# EAGLE board cytron-1 (EAGLE 8.6.1)
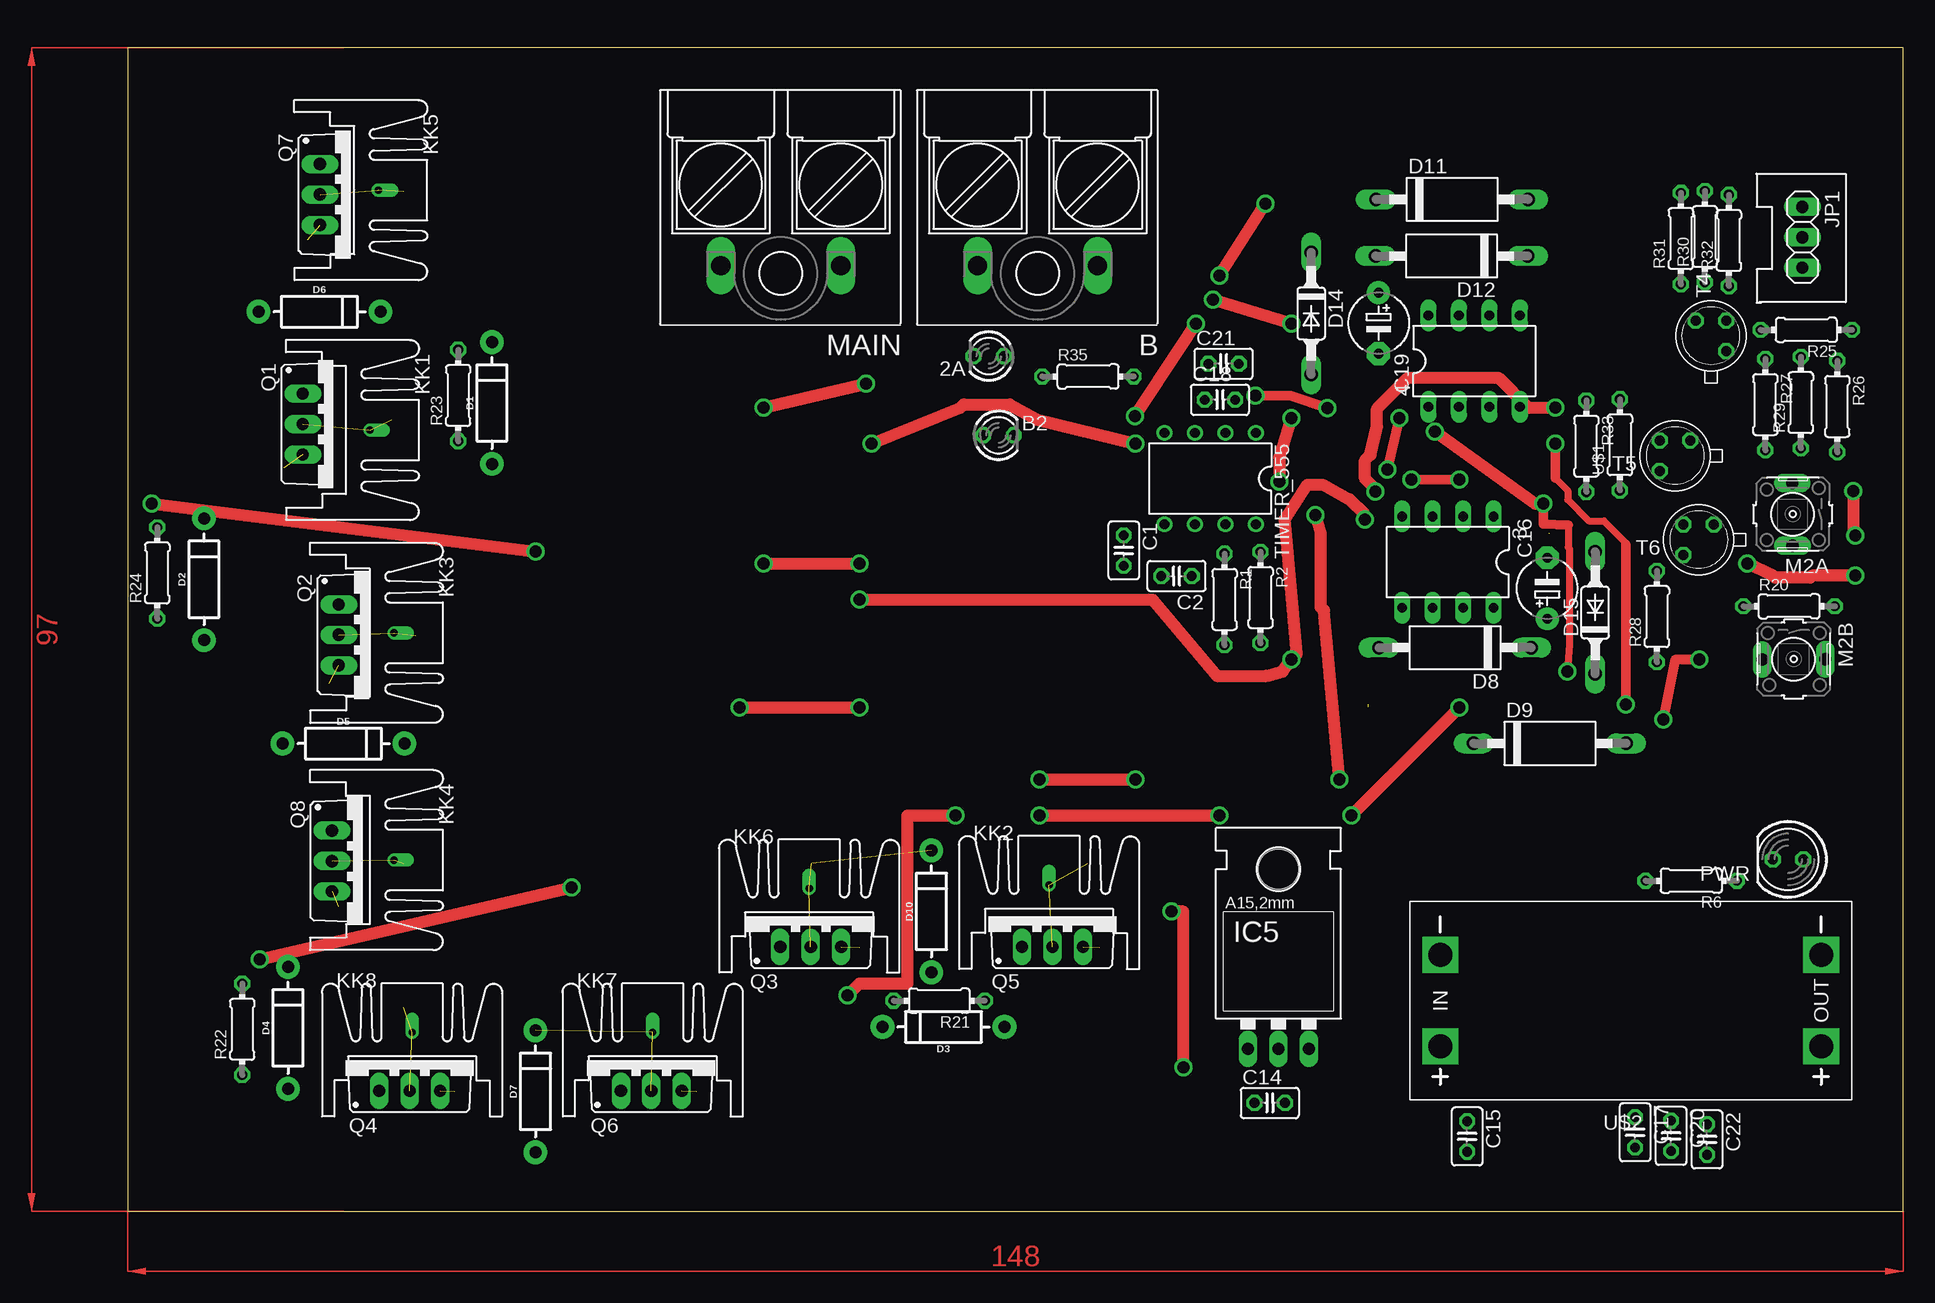
[diagram p0: board, top side]
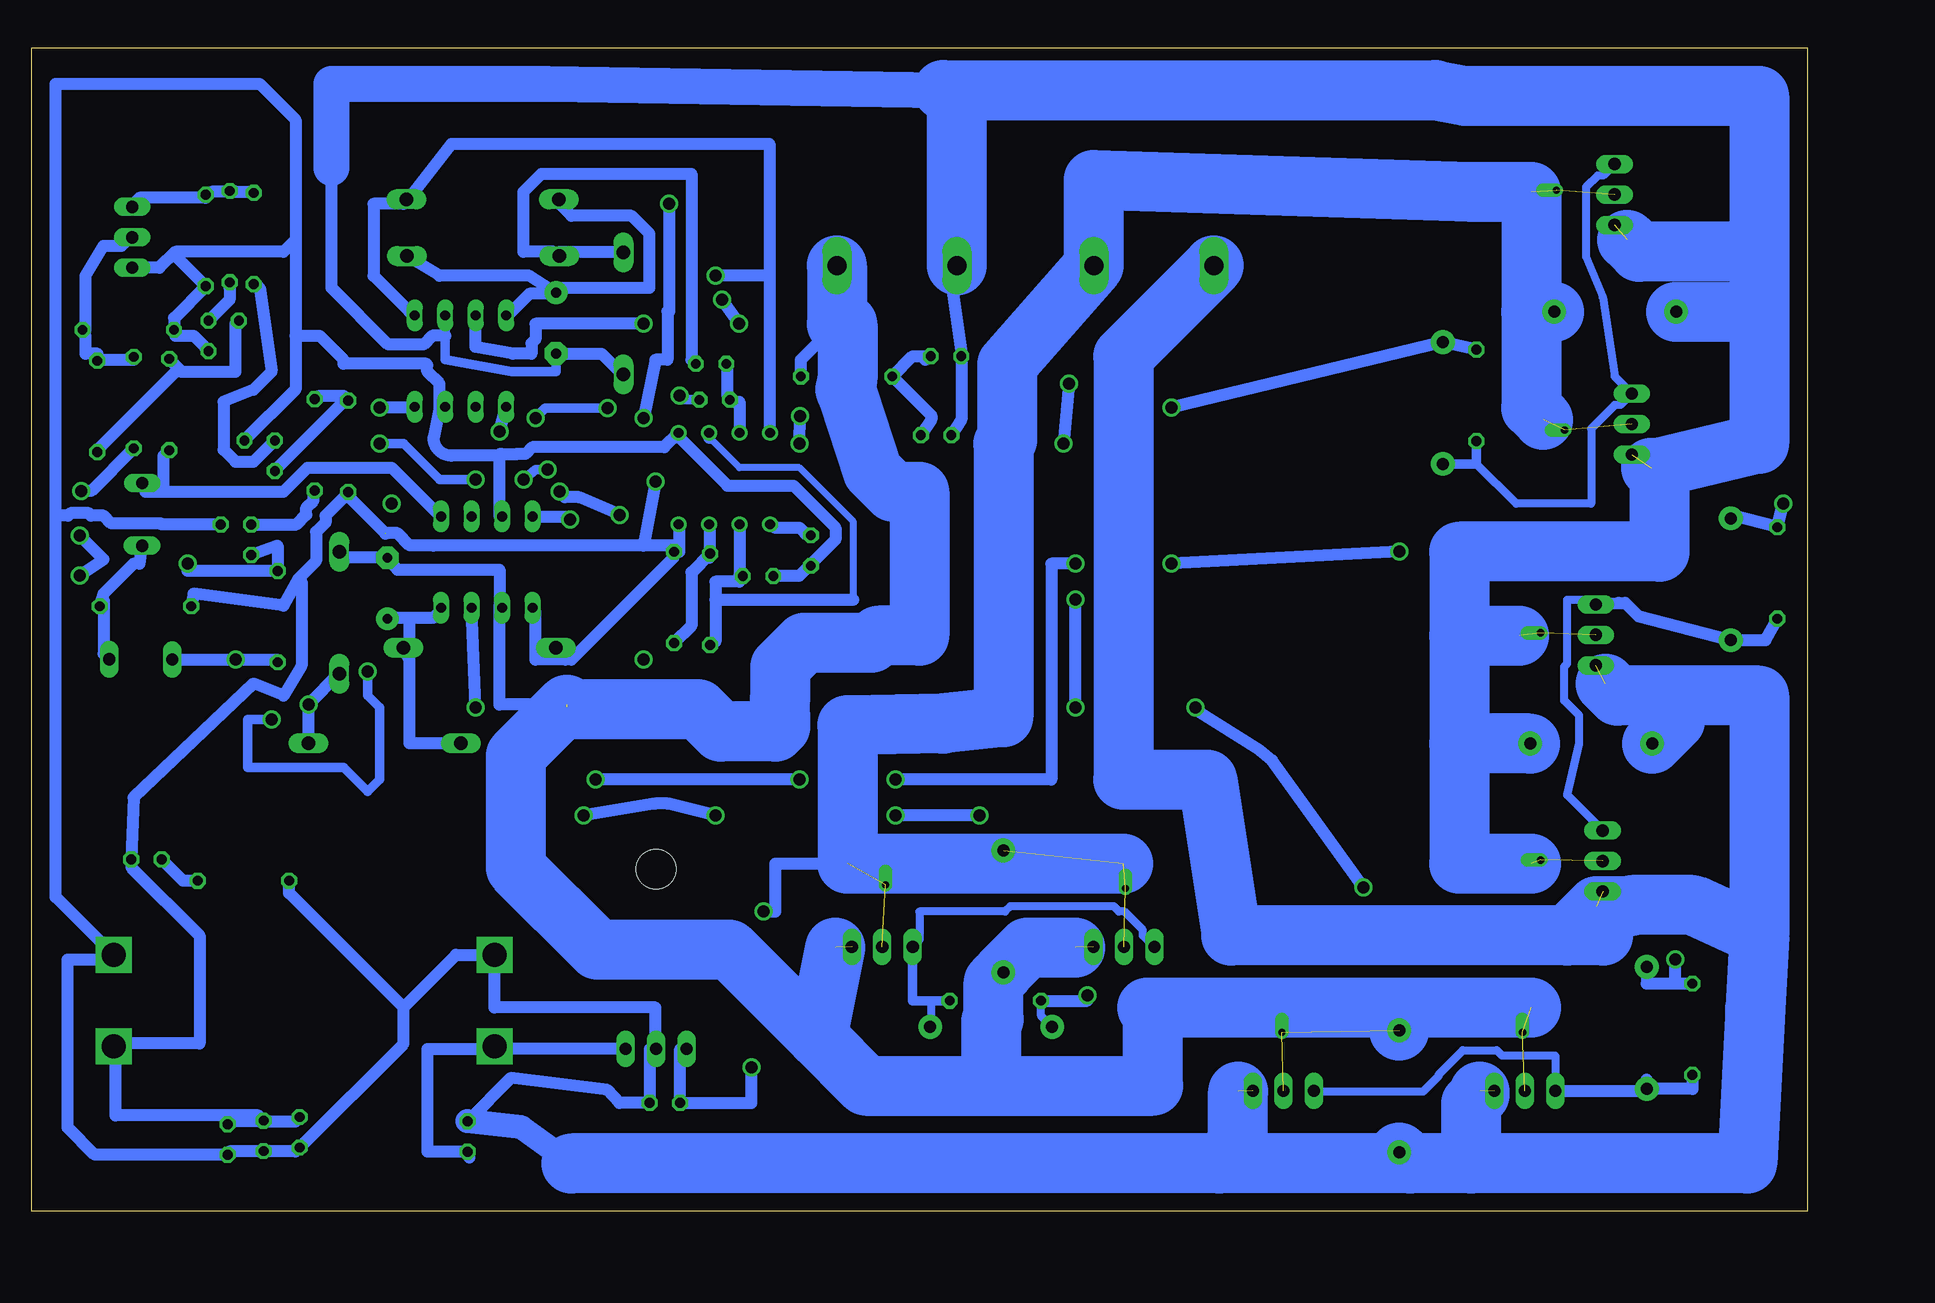
[diagram p1: board, bottom side, seen from below]

Size 148 x 97 mm. Coordinates in mm from the lower left corner, seen from the top.
Outline: 0,0 148,0 148,97 0,97 0,0
Copper layers (1*16): Top 0.035mm / dielectric 1.5mm / Bottom 0.035mm
Design rules "default *": minimum track width 1mm, minimum drill 0.35mm, track to track 0.6mm, track to pad 0.5mm, pad to pad 0.5mm, via to via 0.6mm, smd to smd 6mil, copper to edge 40mil, drill to drill 6mil, minimum pad ring 10mil, minimum via ring 8mil, stop-mask expansion 4mil, vias tented up to drill 0mil, thermal gap 10mil

## Footprints (pad centres in the part's own frame; a part is rotated, then mirrored left to right if it is on the bottom)
LED3MM = drill 0.813 octagon: A -1.27,0; K 1.27,0
DIL08 = drill 0.813 long: 1 -3.81,-3.81; 2 -1.27,-3.81; 3 1.27,-3.81; 4 3.81,-3.81; 5 3.81,3.81; 6 1.27,3.81; 7 -1.27,3.81; 8 -3.81,3.81
W239-302 = drill 1.6 long: 1 -5,5; 2 5,5
C025-025X050 = drill 0.813 octagon: 1 -1.27,0; 2 1.27,0
E5-5 = drill 0.813 pad 1.905: + -2.54,0 | drill 0.813 pad 1.905 octagon: - 2.54,0
DIODE-1N4001 = drill 1 pad 1.981: A -5.08,0; C 5.08,0
DO15-12 = drill 1.118 long: A 6.35,0; C -6.35,0
SOD81 = drill 1.118 long: A 5.08,0; C -5.08,0
78XXL = drill 1.016 long: GND 0,-3.81; IN -2.54,-3.81; OUT 2.54,-3.81 | hole 3.302: 0,11.176
1X03_DATA = drill 1.016 long: 1 -2.54,0; 2 0,0; 3 2.54,0
SK95-2M3 = drill 0.6 offset: P$1 0,2
B3F-10XX = drill 1.016 long: 1 0.013,2.636; 2 0.029,-2.605
LED5MM = drill 0.813 octagon: A -1.27,0; K 1.27,0
TO220BV = drill 1.016 long: D 0,-2.54; G -2.54,-2.54; S 2.54,-2.54
0204/7 = drill 0.813 octagon: 1 -3.81,0; 2 3.81,0
TO18 = drill 0.813 octagon: 1 -1.27,-1.27; 2 1.27,-1.27; 3 1.27,1.27
DIL08' = drill 0.813 pad 1.27: 1 -3.81,-3.81; 2 -1.27,-3.81; 3 1.27,-3.81; 4 3.81,-3.81; 5 3.81,3.81; 6 1.27,3.81; 7 -1.27,3.81; 8 -3.81,3.81
DC-DC-STEP-UP-MT3608 = drill 2 pad 2.8 square: IN+ 15.24,3.81; IN- 15.24,-3.81; OUT+ -16.51,3.81; OUT- -16.51,-3.81

## Placement (x,y rotation side)
2A  [LED3MM]  71.78,71.29 180 top
3  IR2184D  [DIL08]  110.05,54.12 180 top
4  IR2184D  [DIL08]  112.25,70.88 0 top
B  [W239-302]  75.86,83.84 180 top
B2  [LED3MM]  72.6,64.71 0 top
C1  10n  [C025-025X050]  83.04,55.09 270 top
C2  10n  [C025-025X050]  87.44,52.96 180 top
C14  100n  [C025-025X050]  95.21,9.04 0 top
C15  100n  [C025-025X050]  111.66,6.24 270 top
C16  1u  [E5-5]  118.34,51.94 90 top
C17  100n  [C025-025X050]  125.66,6.59 270 top
C18  100n  [C025-025X050]  91.06,67.66 0 top
C19  1u  [E5-5]  104.28,74.05 270 top
C20  100n  [C025-025X050]  128.66,6.29 270 top
C21  100n  [C025-025X050]  91.36,70.66 0 top
C22  100n  [C025-025X050]  131.66,5.99 270 top
D1  1A/50V/1.1V  [DIODE-1N4001]  30.37,67.39 90 top
D2  1A/50V/1.1V  [DIODE-1N4001]  6.37,52.69 90 top
D3  1A/50V/1.1V  [DIODE-1N4001]  68.01,15.37 180 top
D4  1A/50V/1.1V  [DIODE-1N4001]  13.37,15.29 90 top
D5  1A/50V/1.1V  [DIODE-1N4001]  18,39 0 top
D6  1A/50V/1.1V  [DIODE-1N4001]  16,75 0 top
D7  1A/50V/1.1V  [DIODE-1N4001]  34,10 90 top
D8  1N5060GP  [DO15-12]  110.66,46.99 180 top
D9  1N5060GP  [DO15-12]  118.56,39.01 0 top
D10  1A/50V/1.1V  [DIODE-1N4001]  67,25 90 top
D11  1N5060GP  [DO15-12]  110.41,84.36 0 top
D12  1N5060GP  [DO15-12]  110.37,79.64 180 top
D14  zener  [SOD81]  98.66,74.85 270 top
D15  zener  [SOD81]  122.34,49.91 90 top
IC5  [78XXL]  95.94,17.35 0 top
JP1  [1X03_DATA]  139.61,81.2 270 top
KK1  HEAT_SINK  [SK95-2M3]  18.21,65.13 270 top
KK2  HEAT_SINK  [SK95-2M3]  76.82,25.21 0 top
KK3  HEAT_SINK  [SK95-2M3]  20.21,48.23 270 top
KK4  HEAT_SINK  [SK95-2M3]  20.21,29.28 270 top
KK5  HEAT_SINK  [SK95-2M3]  18.91,85.13 270 top
KK6  HEAT_SINK  [SK95-2M3]  56.82,24.91 0 top
KK7  HEAT_SINK  [SK95-2M3]  43.77,12.91 0 top
KK8  HEAT_SINK  [SK95-2M3]  23.72,12.91 0 top
M2A  PUSH_BUTTON  [B3F-10XX]  138.8,58.12 180 top
M2B  PUSH_BUTTON  [B3F-10XX]  138.88,46.04 270 top
MAIN  [W239-302]  54.45,83.84 180 top
PWR  [LED5MM]  138.42,29.34 180 top
Q1  [TO220BV]  17.15,65.63 270 top
Q2  [TO220BV]  20.15,48.06 270 top
Q3  [TO220BV]  56.95,24.58 0 top
Q4  [TO220BV]  23.52,12.58 0 top
Q5  [TO220BV]  77.09,24.58 0 top
Q6  [TO220BV]  43.66,12.58 0 top
Q7  [TO220BV]  18.58,84.77 270 top
Q8  [TO220BV]  19.58,29.2 270 top
R1  10k  [0204/7]  91.44,51.02 270 top
R2  1k  [0204/7]  94.44,51.18 270 top
R6  1k  [0204/7]  130.34,27.56 180 top
R20  10k  [0204/7]  138.5,50.44 0 top
R21  10  [0204/7]  67.66,17.56 180 top
R22  10  [0204/7]  9.56,15.18 90 top
R23  10  [0204/7]  27.56,68.02 90 top
R24  10  [0204/7]  2.48,53.22 90 top
R25  10k  [0204/7]  139.94,73.48 180 top
R26  10k  [0204/7]  142.52,67.1 270 top
R27  10k  [0204/7]  136.52,67.26 270 top
R28  10k  [0204/7]  127.48,49.58 90 top
R29  10k  [0204/7]  139.48,67.42 90 top
R30  10k  [0204/7]  131.48,81.26 90 top
R31  10k  [0204/7]  129.48,81.1 90 top
R32  10k  [0204/7]  133.48,80.94 90 top
R33  10k  [0204/7]  121.6,63.78 270 top
R35  10k  [0204/7]  80.06,69.6 0 top
T4  2N2222  [TO18]  131.99,72.98 90 top
T5  2N2222  [TO18]  128.99,62.99 180 top
T6  2N2222  [TO18]  130.96,55.99 180 top
TIMER_555  LM555N  [DIL08']  90.25,61.09 180 top
U$1  RES-7  [0204/7]  124.4,63.9 90 top
U$2  DC-DC-STEP-UP-MT3608  [DC-DC-STEP-UP-MT3608]  124.66,17.57 180 top

## Library data of the parts
2A B2 PWR = led
3 4 = irs
B MAIN = MIA_LIBRARY-2-2-2; OC_FARNELL: unknown; OC_NEWARK: unknown
C1 C2 C14-C22 = rcl8; SPICEPREFIX: C
D1-D7 D10 = MIA_LIBRARY-2-2-2; PROD_ID: DIO-09176
D8 D9 D11 D12 D14 D15 = diode
IC5 JP1 KK1-KK8 Q1-Q8 U$1 U$2 = MIA_LIBRARY-2-2-2
M2A M2B = MIA_LIBRARY (1)
R1 R2 R6 R20-R33 R35 = rcl8; SPICEPREFIX: R
T4-T6 = transistor
TIMER_555 = linear

## Nets
2A: 3.6 B.1 C16.- D7.C D10.A D15.A KK7.P$1 KK8.P$1 Q3.S Q4.D Q5.S Q6.D R35.2
2B: 2A.K 4.6 B2.A B.2 C19.- D5.C D6.A D14.A KK3.P$1 KK4.P$1 Q1.S Q2.D Q7.S Q8.D
12V: C15.2 IC5.OUT U$2.IN+
+B: C14.1 D6.C D10.C IC5.IN KK1.P$1 KK2.P$1 KK5.P$1 KK6.P$1 MAIN.1 Q1.D Q3.D Q5.D Q7.D
DIR2: JP1.1 R30.2 R31.2 R32.2
GND: 3.3 4.3 C1.2 C2.2 C14.2 C15.1 C17.2 C20.2 C22.2 D5.A D7.A IC5.GND JP1.3 MAIN.2 Q2.S Q4.S Q6.S Q8.S R6.2 R25.2 R32.1 T4.1 T5.1 T6.1 TIMER_555.1 U$2.IN- U$2.OUT-
M2A: 3.1 M2A.2 R27.2
M2B: 4.1 M2B.2 R28.1
N$1: PWR.K R6.1
N$2: C1.1 TIMER_555.5
N$3: R1.1 R2.2 TIMER_555.7
N$4: C2.1 R1.2 TIMER_555.2 TIMER_555.6
N$6: D4.A Q4.G Q6.G R22.1
N$7: M2A.1 M2B.1 R20.2
N$8: T6.2 U$1.1
N$25: D3.A Q3.G Q5.G R21.1
N$26: 3.4 D4.C R22.2
N$30: 3.7 D3.C R21.2
N$31: C18.2 D9.A D15.C
N$32: D2.A Q2.G Q8.G R24.1
N$33: D1.A Q1.G Q7.G R23.1
N$34: 4.4 D2.C R24.2
N$35: 4.7 D1.C R23.2
N$36: C21.2 D12.A D14.C
N$37: R28.2 R29.1 T6.3
N$38: R26.2 R27.1 T4.3
N$39: R30.1 T4.2
N$40: R33.1 T5.3 U$1.2
N$41: R31.1 T5.2
N$46: 2A.A B2.K R35.1
PWM2: JP1.2 R25.1 R26.1 R29.2
TIMER: C18.1 C21.1 TIMER_555.3
VB3: 3.8 C16.+ D8.C D9.C
VB4: 4.8 C19.+ D11.C D12.C
VCC: 3.5 4.5 C17.1 C20.1 C22.1 D8.A D11.A PWR.A R2.1 R20.1 R33.2 TIMER_555.4 TIMER_555.8 U$2.OUT+

## Tracks (layer width: path | path; a pad name or v marks a point on that pad's centre or on a via)
2A  (7 unrouted)
  Bottom 1: 109,50.5 109,53.5 117.5,53.5 118,54 C16.- 118.5,54.5 122,54.5 D15.A | 109,50.5 3.6 | 103.38,42.25 109,42.25 109,50.5 | R35.2 83.87,70.99 80.86,74
  Bottom 5: B.1 80.86,74 80,74 80,69.32 80.18,68.55 80.13,68.41 80.13,68.39 79.9,67.82 77.9,61.71 76.19,60 74,60 74,48 77.41,48 78.01,47.4 83.6,47.4 85.6,45.4 85.6,42.76 85.64,42.72 85.6,40.45 85.6,40.4 86,40 90.56,40 92.41,41.85 103.18,41.85 103.38,42.05 | 103.38,42.25 107.63,38 107.63,28.63 100.83,21.84 89.83,21.84 82.5,14.5 | 68,10.48 78.48,10.48 82.5,14.5 | 68,10.48 54.52,10.48 54.52,16.52 55,17 34,17 | 82.5,14.5 81,22 | 68,10.48 68,15.85 67.81,16.04 67.81,19.11 D10.A 67,20 65,22 61,22 | 34,17 23,17 | D7.C 34,17
2B  (6 unrouted)
  Bottom 0.8: 4.6 113.52,73 113.52,71 108,70 104.28,70 C19.-
  Bottom 1: D14.A 99,70 100.5,71.5 104,71.5 C19.- | B2.A 70.5,66 70.5,71 2A.K 70.5,71.5 71.5,78.5 71,78.5 B.2 70.5,79 | 123,87 123,77 118.27,72.27 115.33,72.27 114.6,73 113.52,73
  Bottom 3: 123,87 123,94 105,94 72,93.48
  Bottom 5: B.2 70.86,92.62 72,93.48 31,93.48 28.52,93 4,93 4,80 | 4,80 4,75 | 4,75 4,64 12.3,62 | 12.3,62 12.33,61.97 13,61.97 | 4,80 14,80 15,81 | 29,48 29,55 12.3,55 12.3,62 | 29,48 29,39 | 29,39 29,29 23,29 | D6.A 4,75 | 29,48 24,48 | D5.C 29,39
12V
  Bottom 1: 111.5,4.5 C15.2 115,4.97 115,13.54 109.42,13.54 | IC5.OUT 109.42,13.54 | 109.42,13.54 U$2.IN+
+B  (via drill 1)  (9 unrouted)
  Top 1: v88,12 88,25 v87,25
  Bottom 1: IC5.IN 93.94,13.54 C14.1 88,9.04 v88,12 | v87,25 86,25 86,29 80,29
  Bottom 5: 57,29 80,29 80,40.51 72,40.66 72.07,40.66 67,41.2 67,64 66.69,64.32 66.69,70.61 MAIN.1 59.45,86 28,85 23,85 23,75 | 22,66 23,67 23,75 | D6.C 23,75
DIR2
  Bottom 1: R31.2 129.5,85 131,85 R30.2 131.5,85 133,85 R32.2 133.5,84.5 139,84.5 139.5,84 JP1.1
GND  (4 unrouted)
  Bottom 1: T4.1 133.5,72 134.5,73 136,73 R25.2 136.13,74.48 R32.1 136,79.65 136,80 | C2.2 86,53 84,53 83.5,53.5 C1.2 83,54 81,56 81,57 84.5,60.5 90,60.5 94,64.5 TIMER_555.1 | 114,67 114.5,64.5 arc-90 113,63 109,63 | 114,67 4.3 | 94.5,64.5 TIMER_555.1 | 111,7.5 C15.1 108.05,11.12 100,10.12 99,9.04 C14.2 96.48,13.54 IC5.GND 96,13.54 96,17 109.42,17 U$2.IN- 112.62,21.38 117,17 | 117,17 117,13.98 C17.2 126,5 128.5,5 C20.2 129,5 131.5,5 C22.2 142.72,4.72 145,7 145,21 141.55,21 U$2.OUT- 146,26.21 146,58 | 117,17 126.53,26.53 R6.2 | 146,58 146,94 129,94 126,91 126,81 | 126,81 127,80 136,80 | 136,80 137.34,78.66 JP1.3 | T5.1 126,68.52 126,73 | 126,81 126,73 | 126,73 124,73 122,71 122,70.67 115.1,70.67 115.11,70.66 115.02,70.53 115.02,70.02 114,69 114,67 | 107.54,63.15 107.57,63.12 | 108.65,58.35 109,58 3.3 arc90 109,58.15 109,63 | 109,63 arc90 108.85,63.15 107.54,63.15 | T6.1 137.17,57.26 137.25,57.35 141.35,57.35 142,58 143.03,58 143.23,58.2 144.77,58.2 144.97,58 146,58 | 107.54,63.15 106.82,63.15 106.27,63.7 95.26,63.7 TIMER_555.1
  Bottom 2: 103,4 107.15,7 C15.1
  Bottom 5: 4,23 4,43 11,43 | 4,23 4.32,16.91 5,4 28,4 | 28,4 33.08,4 | 33.08,4 49,4 | 49,4 103,4 | 4,23 9.54,25.54 14.62,25.54 14.72,25.44 17.56,25.44 20,23 | 11,43 15.81,43 16.81,44 | MAIN.2 57,71.29 57,36 50,36 48,23 20,23 | 17,23 20,23 | D5.A 11,40.92 11,43 | 49,4 47.42,5.58 47.42,10 | 28,4 28,9 27.28,9.72 27.28,10 | D7.A 33.08,4
M2A
  Bottom 1: 137,60 138.5,60 M2A.2 | 137,60 127,60 125,62 118,62 114,58 3.1 | 137,60 137,63 R27.2
M2B  (via drill 1)
  Top 0.6: 120.09,57.21 120.09,55.35 120.19,55.25 120.19,47.19 v120,45
  Top 0.8: 117.32,59 v118,59 118,57.3 120.09,57.21 | v128,41 129,46 v131,46
  Top 1: 117.32,59 v108.99,64.99
  Bottom 0.8: v120,45 120,43 119,42 119,36 120,35 122,37 130,37 130,41 v128,41
  Bottom 1: R28.1 127.5,46 v131,46 136,46 M2B.2 | v108.99,64.99 4.1
N$1
  Bottom 1: R6.1 135.37,27.56 PWR.K
N$2
  Bottom 1: C1.1 83.5,56.5 84,57 86,57 TIMER_555.5
N$3
  Bottom 1: R1.1 91.5,55 91.5,57 TIMER_555.7 | 91.5,54.5 R1.1 | R1.1 93,53.27 93,48.81 R2.2
N$4
  Bottom 0.6: 91.5,64.5 89,62 84,62 79.5,57.5 79.5,51
  Bottom 1: TIMER_555.6 89,57 89,53 C2.1 89,52.5 91,52.5 91,51 | 91,51 91,47.5 R1.2 | 91,51 79.5,51 | 91.5,64.5 TIMER_555.2
N$6
  Bottom 0.65: Q6.G 41.08,10 32,10 30.71,11.29 30.71,11.42 28.7,13.43 25.86,13.43 25.44,13 21,13 21,10.06 Q4.G
  Bottom 1: Q4.G 13.37,10.04 D4.A | 13.37,11 D4.A | R22.1 9.56,10.21 D4.A
N$7
  Bottom 1: M2A.1 139,54 139.5,54 142,51.5 R20.2 142,51 142,46.5 M2B.1
N$8
  Bottom 1: U$1.1 124.5,60 124.5,59.26 125.1,58.66 125.1,58.07 125.91,57.26 T6.2
N$25
  Bottom 0.65: Q3.G 55.36,22.99 55.36,23.46 56.9,25 57.37,25 57.8,25.43 66.42,25.43 66.84,25 74,25 74,22.59 Q5.G | D3.A 73,15.46 73,17.56
  Bottom 0.8: Q5.G 74.55,17.56 73,17.56 R21.1
N$26  (via drill 1)
  Top 1: v11,21 v37,27 | v51,42 v61,42 | v61,51 85.44,51 90.79,44.65 94.93,44.65 96.28,45 v97,46 97.46,46.46 96.46,57.67 98.36,60.58 99.64,60.58 101.86,59.35 103.13,58.08 v103.13,57.69
  Bottom 0.8: 106.17,58 3.4
  Bottom 1: D4.C 13.37,18.99 11,18.99 | 11,18.99 R22.2 | 11,18.99 v11,21 | v37,27 44.6,37.6 45.6,38.41 51,41.81 v51,42 | v61,42 v61,51 | 3.4 103.13,57.93 v103.13,57.69
N$30  (via drill 1)
  Top 1: v76,33 v91,33 | v102,33 v111,42 | v60,18 61,19 65,19 65,33 v69,33
  Bottom 0.65: D3.C 63.85,16.29 R21.2
  Bottom 1: v69,33 v76,33 | v91,33 95,34 96,34 v102,33 | v111,42 3.7 | R21.2 60,17.56 v60,18
N$31  (via drill 1)
  Top 0.6: 119,61.14 120.04,60.1 120.04,59.32 121.8,57.57 123.06,57.57 124.91,55.72 124.91,55.58
  Top 0.8: v94,68 96.94,68 v100,66.94 | v106,66.15 v105,61.85 | v107,61 v111,61 | v119,64 119,61.14 | 124.91,55.58 v124.91,42.26
  Bottom 0.8: C18.2 93.66,67.66 v94,68 | v100,66.94 105.21,66.94 v106,66.15 | v105,61.85 106,61.85 v107,61 | v111,61 114,61 117,64 v119,64
  Bottom 1: D9.A v124.91,42.26 D15.C
N$32
  Bottom 0.65: Q8.G 20,34.7 19,39 19,41.35 20.23,42.58 20.23,45.42 20,45.65 20,51 18.01,51 Q2.G
  Bottom 1: Q2.G 15.73,50.72 15.16,50.72 14.05,49.61 D2.A 3.48,47.61 R24.1
N$33
  Bottom 0.65: Q7.G 16.99,86.36 17.46,86.36 18.43,85.39 18.43,79.58 17.04,76.2 16.04,69.6 Q1.G 15.56,67.22 16.03,67.22 18,65.25 18,59 24.25,59 27.56,62.31
  Bottom 0.8: D1.A 27.56,62.31 R23.1
N$34  (via drill 1)
  Top 1: v2,59 v34,55 | v53,54 v61,54 | v76,36 v84,36 | v101,36 99.73,50.1 99.46,50.36 99.46,56.58 v99,58.04 | v104,60 104,60.23 103.15,61.08 103.15,62.62 103.61,63.08 104.15,65.38 104.15,66.92 106.72,69.49 114.25,69.49 116.74,67 v119,67
  Bottom 1: D2.C 6.37,58.03 R24.2 v2,59 | v34,55 v53,54 | v61,54 63,54 63,36 v76,36 | v84,36 v101,36 | v99,58.04 98.86,58.04 102.36,59.54 103.54,59.54 v104,60 | 4.4 116.06,67 v119,67
N$35  (via drill 1)
  Top 1: v53,67 v61.54,69 | v62,64 69.41,67 69.68,67.27 73.52,67.27 75.79,66 v84,64 | v83.96,66.29 v89.04,74 | v90.46,76 v97,74
  Bottom 1: R23.2 D1.C v53,67 | v61.54,69 v62,64 | v84,64 v83.96,66.29 | v89.04,74 v90.46,76 | v97,74 106,74 106,72.69 106.33,72.36 106.33,71.5 107.86,71.5 110.99,72.07 4.7
N$36
  Bottom 1: C21.2 93,71 93,86.5 105.5,86.5 107,85 107,80 104.5,80 D12.A 104,80 99,80 D14.C
N$37  (via drill 1)
  Top 1: v144,56.35 143.85,56.5 v143.85,60.05 | v144,53 140.42,53 140.24,52.82 137.34,52.82 137.16,53 v135,54
  Bottom 1: T6.3 127.5,55.5 127.5,53.5 R28.2 135,53.39 v135,54 | v144,56.35 142,54.35 v144,53 | R29.1 143.04,60.05 v143.85,60.05
N$38
  Bottom 1: 135.75,70.25 136.5,71 R27.1 | 135.75,70.25 135.5,70 131,70 131,74 T4.3 | 135.75,70.25 142.5,63.5 R26.2
N$39
  Bottom 1: T4.2 133,74.5 131.5,76 131.5,77 R30.1
N$40
  Bottom 1: U$1.2 124,68 122,68 R33.1 122,67.5 127.5,62 T5.3
N$41
  Bottom 1: T5.2 128,64 129.5,62.5 131,62.5 132,63.5 132,67.5 129.5,68.5 128,70 129,77 R31.1
N$46
  Bottom 1: B2.K 73,66 73,66.35 R35.1 74.56,71.29 2A.A 73.5,71
PWM2
  Bottom 1: R29.2 139.5,71 142.5,71 R26.1 142.5,71.5 143.5,71.5 143.5,73 R25.1 143.5,73.5 143.5,78 142,80.5 140.5,80.5 140,81 JP1.2
TIMER
  Bottom 1: TIMER_555.3 89,65 89,67.5 89.5,67.5 C18.1 90,68 90,70.5 C21.1
VB3
  Bottom 1: 116.5,49.5 118,49.5 C16.+ | 116.5,49.5 114.5,49.5 114,50 3.8 | 116.5,46 116.5,49.5 | 116.5,46 D8.C | D9.C 116.5,39.01 116.5,46
VB4
  Bottom 1: 4.8 108,75 106.5,76.5 104.5,76.5 C19.+ | D12.C 116.5,79.5 114,78 106.5,78 C19.+ | D11.C 104,84 103,83 98,83 96.5,81.5 96.5,77 104,77 C19.+
VCC  (via drill 1)  (1 unrouted)
  Top 1: v91,78 v94.85,84 | v97,66.15 96,62.85 v96,60.85
  Bottom 1: 86.5,78 86.5,89 113,89 116.5,84.5 D11.A 117,84 119.5,84 119.5,78 116.5,75 4.5 | 86.5,78 86.5,65 TIMER_555.4 | C22.1 131.5,7.5 129,7.5 C20.1 | C17.1 126,7.5 128.5,7.5 C20.1 | 125.75,52.75 127,50.5 134.5,51.5 R20.1 | TIMER_555.8 94,57 94,55 R2.1 | 3.5 106,50 106,46 103.5,46 D8.A 103,46 94.5,54.5 R2.1 | 118.5,56.5 121.5,59.5 R33.2 122,59.5 123.5,58 123.5,57.41 124.28,56.63 124.28,54.22 125.75,52.75 | 97,55.5 94.5,55.5 R2.1 | 97,55.5 114.5,55.5 114.51,55.51 116.47,55.51 117.49,56.53 118.5,56.53 | 125.75,52.75 125.5,52.5 125.5,45.5 127,43 129.5,44 139.5,34.5 PWR.A 139.69,28.69 134,23 134,14 140.93,14 141,13.93 | 86.5,78 v91,78 | v94.85,84 94.85,75.02 95,75.02 95,71 96,71 v97,66.15 | v96,60.85 97,55.5 | 141,13.93 U$2.OUT+ | C20.1 129.1,8 141,8 141,13.93
(copper drawn outside any net)
  shapes: Top area x2